# Altium PCB PCB_MKD_V2.PcbDoc
Units mil, origin at the board's own origin, x right, y up, seen from the top; angles counter-clockwise.
Board outline 6290 x 3545 mil, 2 copper layers (Top Layer, Bottom Layer); 42 components, 27 nets, 125 pads, 9 vias.
Unrouted connection lines stored in the file: 2.
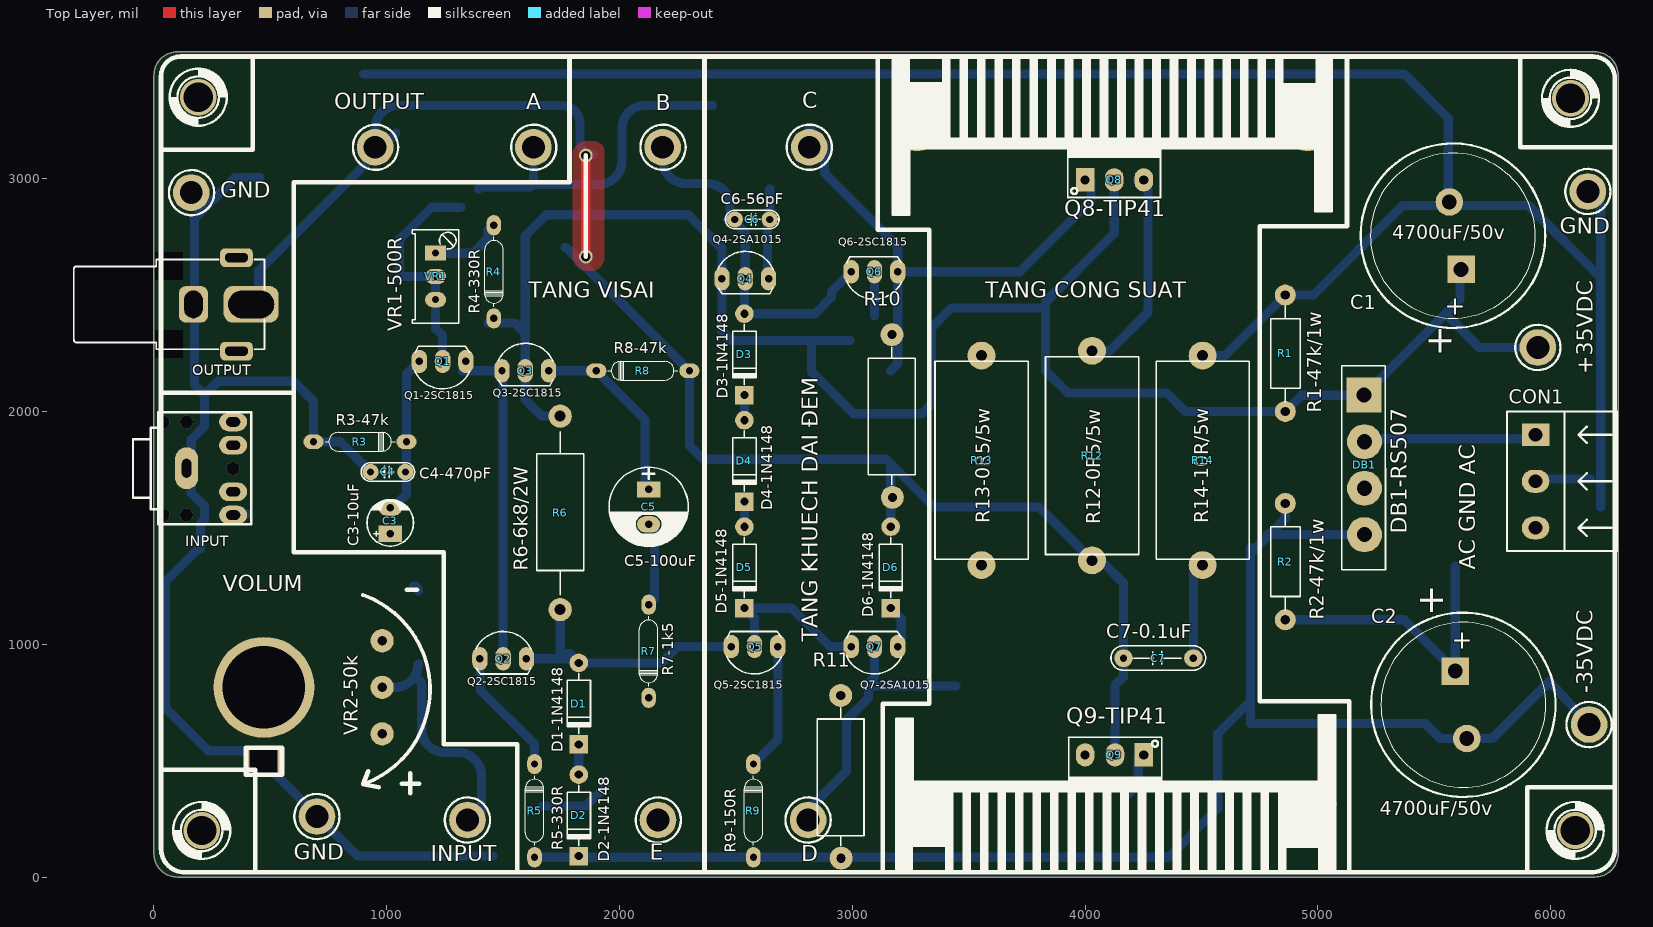
[diagram p0: Top Layer view]
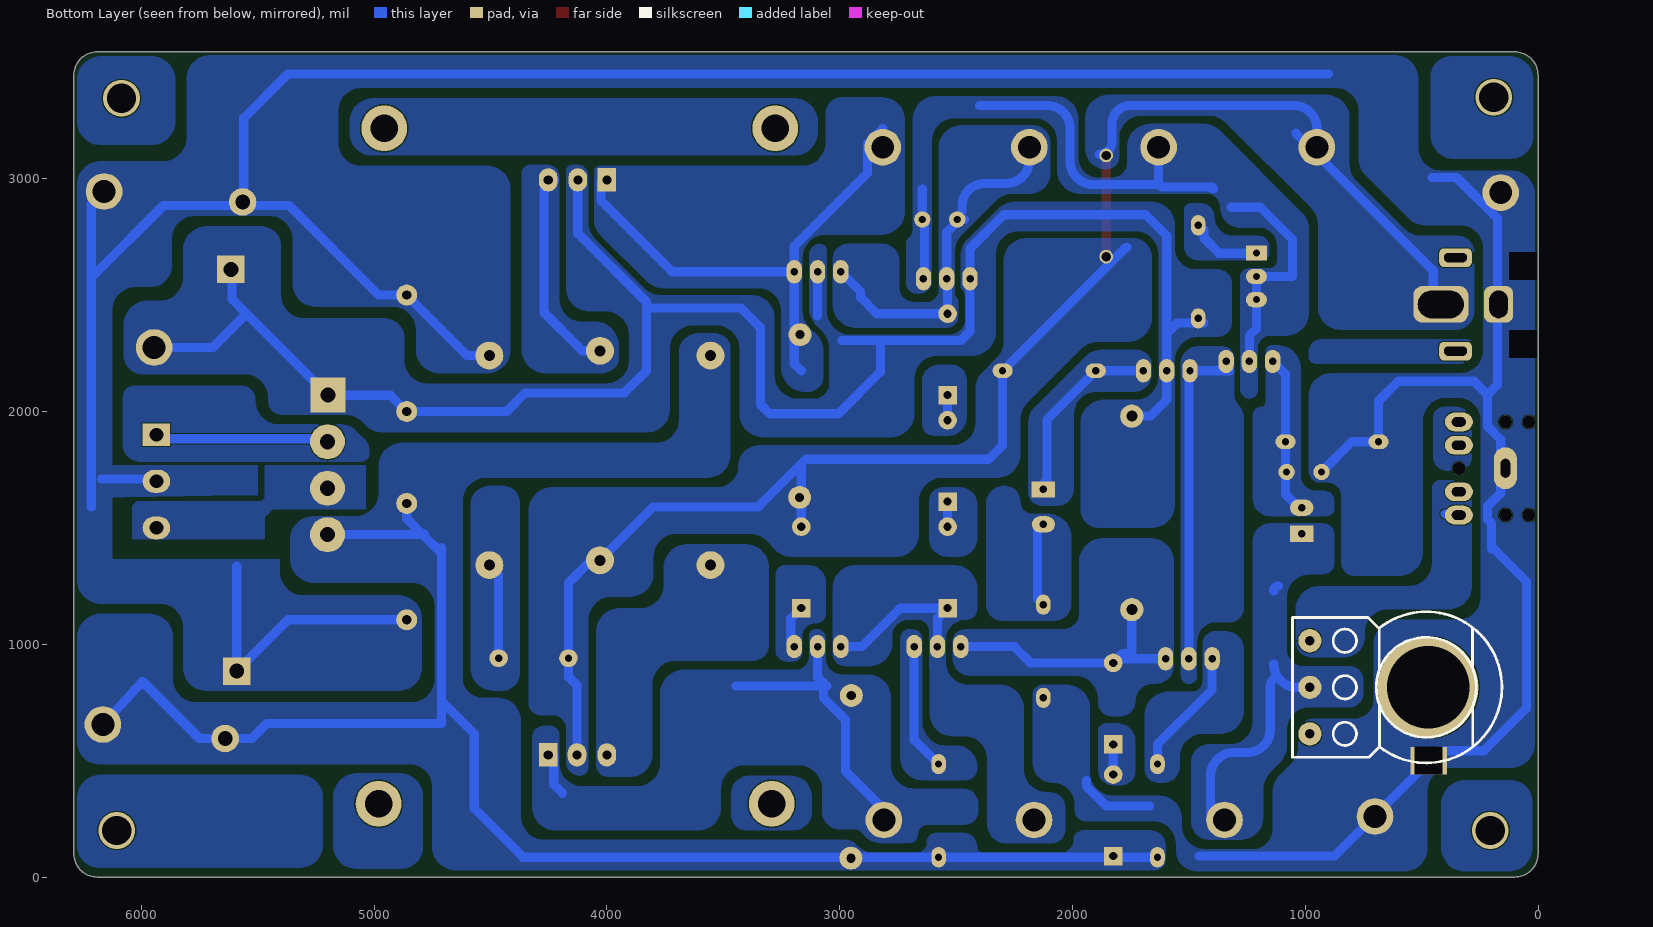
[diagram p1: Bottom Layer view, seen from below]
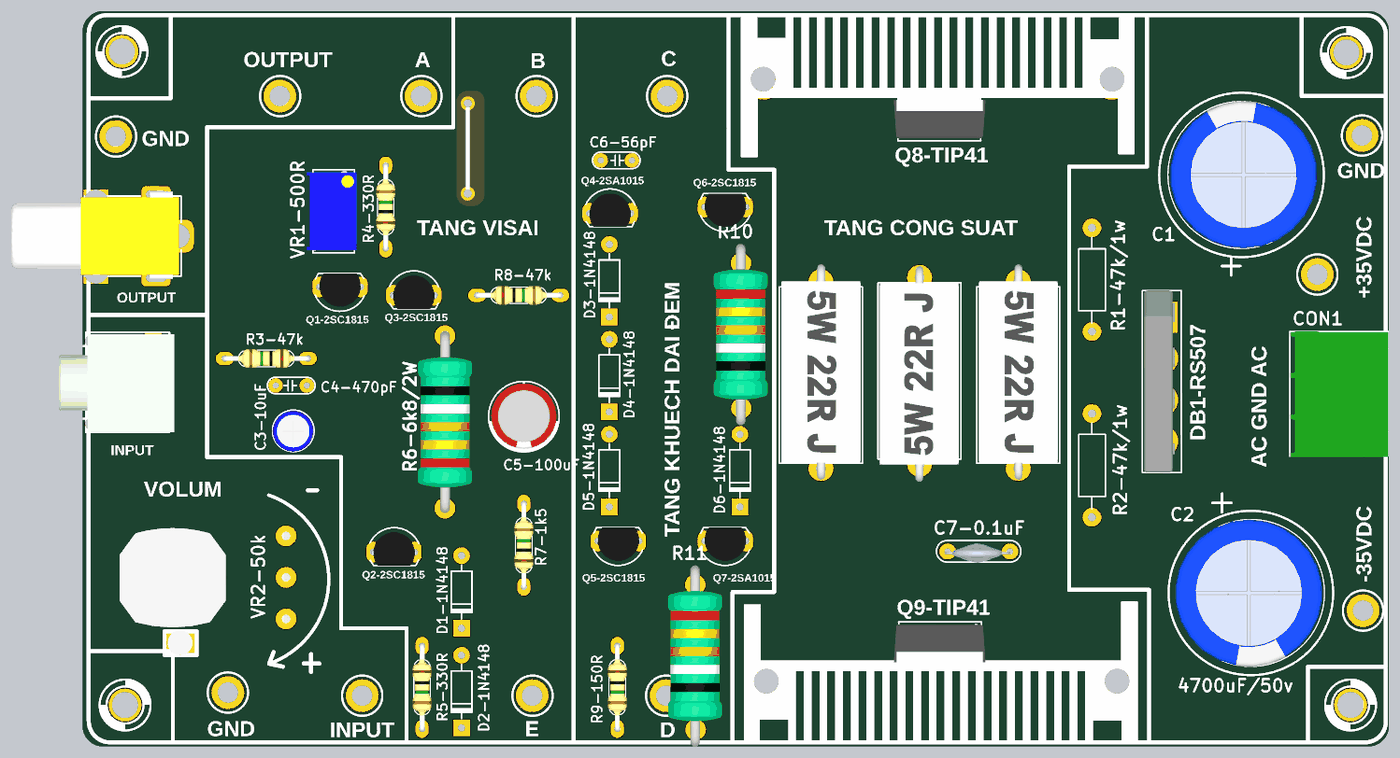
[diagram p2: 3D render of the assembled board from above, using the file's embedded part models]

## Layer stack, top to bottom
Top Solder: solder mask 0.4, Solder Resist, Dk 3.5
Top Layer: signal copper 1.4
Dielectric 1: dielectric 12.6, FR-4, Dk 4.8
Bottom Layer: signal copper 1.4
Bottom Solder: solder mask 0.4, Solder Resist, Dk 3.5

## Board outline
100,3545 ccw(c100,3445) 0,3445 0,100 ccw(c100,100) 100,0 6190,0 ccw(c6190,100) 6290,100 6290,3445 ccw(c6190,3445) 6190,3545

## Design rules (kind name [scope] priority, off if disabled: settings)
Clearance [All] p1: gap=10 ignorepadtopadclearanceinfootprint=FALSE except(0: Arc-Hole Track-Hole SMDPad-Hole THPad-Hole Via-Hole Fill-Hole Poly-Hole Region-Hole Text-Hole; 5: Arc-Fill Arc-Poly Arc-Region Track-Fill Track-Poly Track-Region SMDPad-Fill SMDPad-Poly SMDPad-Region THPad-Fill THPad-Poly THPad-Region Via-Fill Via-Poly Via-Region Fill-Fill Fill-Poly Fill-Region Poly-Poly Poly-Region Region-Region)
PlaneConnect [All] p1: planeconnectstyle=Direct reliefexpansion=20 reliefentries=4 reliefconductorwidth=10 reliefairgap=10
PolygonConnect [All] p1: connectstyle=Direct reliefconductorwidth=10 reliefentries=4 polygonreliefangle="90 Angle" airgapwidth=10
RoutingVias [All] p1: holewidth=28 width=50 viastyle="Through Hole" minholewidth=28 minwidth=50 maxholewidth=28 maxwidth=50
SolderMaskExpansion [All] p1: expansion=4
Width [All] p1: maxlimit=39.37 minlimit=39.37 preferedwidth=39.37 minimp=50.000000 maximp=50.000000 favimp=50.000000
29 further rules are at their usual default settings.

## Components (designator, comment, footprint, x,y, rotation, side; value= is the part's Value field where it differs from the comment)
C1 "4700uF/50v" CA-ALU-18 5580,2755 r90 top value=104
C2 "4700uF/50v" CA-ALU-18 5625,740 r270 top value=104
C3 "C3-10uF" CP1/2 1015,1475 r90 top value=10uF/50V
C4 "C4-470pF" CN1.5 930,1740 r0 top value=0.01uF
C5 "C5-100uF" CP1.5/3.4 2125,1665 r270 top value=100uF/35V/50V
C6 "C6-56pF" CN1.5 2645,2825 r180 top value=0.01uF
C7 "C7-0.1uF" CN3 4465,940 r180 top value=0,047uF
CON1 "CON3" "CON 3 5.08" 5935,1700 r270 top
D1 "D1-1N4148" D1A 1825,920 r90 top value=1N4007
D2 "D2-1N4148" D1A 1825,440 r90 top value=1N4007
D3 "D3-1N4148" D1A 2536.5,2420 r90 top value=1N4007
D4 "D4-1N4148" D1A 2536.5,1962.5 r90 top value=1N4007
D5 "D5-1N4148" D1A 2536.5,1505 r90 top value=1N4007
D6 "D6-1N4148" D1A 3165,1505 r90 top value=1N4007
DB1 "DB1-RS507" "DIO-Bri 5A" 5200,2070 r270 top value="Cau 1A"
INPUT "CON Phone" "CON Phone2" 240,1755 r90 top
OUTPUT "CON Video" TRC-005 445,2460 r0 top
Q1 "Q1-2SC1815" TO92-123 1240,2215 r180 top value=C1815
Q2 "Q2-2SC1815" TO92-123 1500,937.43 r0 top value=C1815
Q3 "Q3-2SC1815" TO92-123 1595,2175 r0 top value=C1815
Q4 "Q4-2SA1015" TO92-123 2540,2570 r0 top value=A1015
Q5 "Q5-2SC1815" TO92-123 2580,990 r180 top value=C1815
Q6 "Q6-2SC1815" TO92-123 3095,2600 r180 top value=C1815
Q7 "Q7-2SA1015" TO92-123 3095,990 r180 top value=A1015
Q8 "Q8-TIP41" QTO-220#1 4025,2995 r0 top value=TIP41C
Q9 "Q9-TIP41" QTO-220#2 4228.46,525 r180 top value=TIP41C
R1 "R1-47k/1w" R1W 4860,2500 r270 top value="R1W - 100"
R2 "R2-47k/1w" R1W 4860,1605 r270 top value="R1W - 100"
R3 "R3-47k" "DIEN TRO 1/4 W" 1085,1870 r180 top value=47k
R4 "R4-330R" "DIEN TRO 1/4 W" 1460,2400 r90 top value=4k7
R5 "R5-330R" "DIEN TRO 1/4 W" 1635,485 r270 top value=R
R6 "R6-6k8/2W" R2W 1745,1149 r90 top value="R2W - 47"
R7 "R7-1k5" "DIEN TRO 1/4 W" 2125,770 r90 top value=1k5
R8 "R8-47k" "DIEN TRO 1/4 W" 1900,2175 r0 top value=45k
R9 "R9-150R" "DIEN TRO 1/4 W" 2575,485 r270 top value=120R
R10 "330" "RES 2W-" 3170,1980 r270 top
R11 "330" "RES 2W-" 2950,430 r270 top
R12 "R12-0R5/5w" R5W 4030,1360.68 r90 top value="R5W - 0,47R"
R13 "R13-0R5/5w" R5W 3555,2240 r270 top value="R5W - 0,47R"
R14 "R14-10R/5w" R5W 4505,2240 r270 top value="R5W - 0,47R"
VOLUM "VOL-50K" VOL_SMD 980,615 r90 top value="Volume 50k"
VR1 "VR1-500R" VR1 1210,2680 r270 top value="VR 10K"

## Footprints (in the part's own frame and the unit in brackets; to place one, negate y for a bottom-side part, rotate by r counter-clockwise, add the part's x,y. Pads: shape width x height; smd on the part's side, far side on the other; paste and mask are expansions set on the pad)
CA-ALU-18 [mm] "Polarized capacitors, Aluminum Electrolytic Capacitors, 2-Leads, Body 18x35.5x7.5x0.8"
  rect 3x3 hole 1.6: 1(-3.683,-0.889)
  round 3 hole 1.6: 2(3.683,0.381)
  silkscreen extent -9,-9 9,9, body extent -9,-9.25 9.05,8.75, height 35.45
CN1.5 [mil]
  round 70 hole 31: 1(0,0) 2(150,0)
  silkscreen extent -40,-40 190,40
CN3 [mil] "Cap np W 0.3"
  oval 80x75 hole 31: 1(0,0) 2(300,0)
  silkscreen extent -53,-53 354,51, body extent 0,-39 315,55, height 419
"CON 3 5.08" [mm]
  rect 2.5x3 hole 1.5: 1(-5.08,0)
  oval 2.5x3 hole 1.5: 2(0,0) 3(5.08,0)
  silkscreen extent -7.62,-3.1 7.62,8.89, body extent -7.62,-3.05 7.71,8.95, height 8.6
"CON Phone2" [mil]
  oval 80x120 hole 40 slot 60 at 90 deg: 1(-200,-100) 2(-100,-100) 3(100,-100) 4(200,-100)
  oval 180x100 hole 40 slot 80 at 0 deg: 5(1,100)
  silkscreen extent -240,-178 241,330, body extent -239,-202 233,354, height 394
CP1.5/3.4 [mil] "Tu hoa 220->470uF,16V, 470uF/16V,25V"
  rect 70x100 hole 32: 1(0,0)
  oval 70x100 hole 32: 2(150,0)
  silkscreen extent -95,-170 245,170, body extent -85,-157 230,157, height 446
CP1/2 [mil] "Tu hoa < 22uF/16>50V"
  rect 70x100 hole 32: 1(0,0)
  oval 70x100 hole 32: 2(111.61,0)
  silkscreen extent -53,-100 146,100, body extent -54,-99 144,100, height 296
D1A [mil] "Diode 1A, W 100mil, L 350mil"
  round 80 hole 35: 1(0,0)
  rect 80x80 hole 35: 2(-350,0)
  silkscreen extent -305,-50 -45,50, body extent -366,-42 16,41, height 100
"DIEN TRO 1/4 W" [mm]
  oval 2.2x1.6 hole 0.787: 1(0,0) 2(10.16,0)
  silkscreen extent 1.26,-1.02 8.88,1.02, body extent -0.3,-1.16 10.46,1.16, height 2.93
"DIO-Bri 5A" [mil] "Brigde 5A"
  rect 150x150 hole 65: 1(0,-2)
  round 150 hole 65: 2(200,0) 3(400,0) 4(599,0)
  silkscreen extent -127,-97 750,90, body extent -129,-90 749,58, height 937
QTO-220#1 [mil] "TO-220 - 1-2-3"
  rect 80x100 hole 39: 1(-25,0)
  oval 80x100 hole 39: 2(100,0) 3(226.97,0)
  silkscreen extent -100,-76 300,130, body extent -119,-64 322,121, height 905
QTO-220#2 [mil] "TO-220 - 1-2-3"
  rect 80x100 hole 39: 1(-23.51,0)
  oval 80x100 hole 39: 2(100,0) 3(228.46,0)
  silkscreen extent -100,-76 300,130, body extent -119,-64 322,121, height 905
R1W [mil] "R 1W, 2 pin, 500mil"
  round 90 hole 39.37: 1(0,0) 2(500,0)
  silkscreen extent 46,-63 460,65
R2W [mm] "R2W, 2 pin, 700mil"
  round 2.54 hole 1.2: 1(0,0) 2(21.107,0)
  silkscreen extent 1.63,-2.57 19.41,2.54, body extent -0.6,-3.3 21.6,3.3, height 8.3
R5W [mil] "R5W , 2 pin, 400 x 950mil"
  round 120 hole 47.24: 1(0,0) 2(900,0)
  silkscreen extent 25,-200 875,200, body extent -85,-190 955,192, height 363
"RES 2W-" [mm]
  round 2.5 hole 1: 1(-8.89,0) 2(8.865,0.051)
  silkscreen extent -7.52,-2.57 7.49,2.54, body extent -11.25,-3.33 10.95,3.27, height 8.3
TO92-123 [mil] "TO-92"
  oval 66x100 hole 32: 1(-100,0) 2(0,0) 3(100,0)
  silkscreen extent -117,-65 120,118, body extent -109,-66 109,95, height 245
TRC-005 [mm] "RCA Phono Jack, Right Angle, Thru-Hole, Body 20.8 x 9.8 x 11 mm (LxWxH)"
  rrect50% 3.2x4 hole 2 slot 3 at 90 deg mask+0: 1(-7,0)
  rrect50% 3.556x2.032 hole 1 slot 2.5 at 0 deg: 2(-2.3,5.1) 3(-2.3,-5.1)
  rrect50% 6x4 hole 5 slot 3 at 90 deg: 4(-0.7,0)
  silkscreen extent -20.05,-4.9 0.75,4.9, body extent -20.02,-5.27 0.48,5.52, height 13.58
VOL_SMD [mil]
  round 433.07 hole 354.33: 0(200,507.56)
  round 100 hole 40: 1(0,0) 2(200,0) 3(400,0)
  body extent -203,-247 600,948, height 866
VR1 [mil] "Variable Resistor"
  rect 65x90 hole 30: 1(0,0)
  oval 65x90 hole 30: 2(100,0) 3(200,0)
  silkscreen extent -100,-100 301,100, body extent -88,-130 288,110, height 455

## Part data
C1 C2: library part CN-ALU-DIP, "Capacitor (Semiconductor SIM Model)", LatestRevisionDate=17-Jul-2002, LatestRevisionNote="Re-released for DXP Platform.", PackageReference=C1206, Publisher="Altium Limited"
C3: library part CP1, "Cap P  0,1uF < 22uF , 16 - 50V", Description 1="10 => 220uF/6,3V/10V - 10uF => 100uF/16V", Description 2="0,1uF => 33uF/50V - 10uF => 22uF/63V", Description 3="0,47uF => 10uF/100V"
C4 C6: library part CN1.5, "Cap np 682pF => 104pF"
C5: library part CP3, "Cap 100uF/35V - 470uF/16V", Description 1="1000uF/6,3V - 470uF/16V - 330uF - 25V", Description 2="220uF/35V - 100uF/50V - 63V - 4,7uF/200V", Description 3="22uF => 33uF100V - 3,3uF => 4,7uF/250V", Description 4="2,2uF =>3,3uF/350 - 2,2uF/400V - 1uF/450V"
C7: library part CN3, "Cap np W0.3", Copyright=VanDungEvn
D1 D2 D3 D4 D5 D6: library part D1A, "Diode 1A"
DB1: library part "DIODE BRIGDE", "Convert AC to DC voltage, 4 pin", ="Cau 5A"
INPUT: library part "CON Phone2", "Jac Phone Stereo", Creat by=VanDungEvn@Gmail.com
OUTPUT: library part "CON Video1", "Jac Video Stereo"
Q1 Q2 Q3 Q5 Q6: library part 2SC1815, "NPN 600mW, ECB", =C2383
Q4 Q7: library part 2SA1015, "PNP 600mW, ECB", =A1013
Q8 Q9: library part TIP41C, "NPN 2W, BCE", =H1061
R1 R2: library part R1W, "Resistor 1W"
R3 R4 R5 R7 R8 R9: library part "Res 1/4 W", "Resistor", LatestRevisionDate=17-Jul-2002, LatestRevisionNote="Re-released for DXP Platform.", PackageReference=AXIAL-0.4, Published=8-Jun-2000, Publisher="Altium Limited"
R6: library part R2W, "Resistor 2W"
R10 R11: library part "Res 2W"
R12 R13 R14: library part R5W, "Resistor 5W"
VOLUM: library part VOL-S, "Var Resistor"
VR1: library part VR, "Var Resistor"

## Free pads (board coordinates)
  round 196.85 hole 118.11: 2(3277.13,3216.54) 2(4980.75,314.96) 3(3292.13,314.96) 3(4956.81,3216.54)
  round 59.06 hole 39.37: 20(1855,2665) 21(1855,3100)
  round 157.48 hole 98.43: 22(6160,2945) 23(5945,2275) 24(6165,655) 25(700,260) 26(1346.67,245) 28(2810,245) 29(2815,3135) 31(950,3135) 32(160,2940) 34(1630,3135) 35(2165,245) 36(2185,3135)
  rect 118.11x118.11 hole 118.11 square: 38(65,2625) 39(65,2290)
  rect 157.48x118.11 hole 118.11 square: 43(470,500)

## Via types
v1: diameter 55, hole 55, Top Layer to Bottom Layer, 5 vias
v2: diameter 157.48, hole 125.98, Top Layer to Bottom Layer, 4 vias

## Nets (pads, with @x,y where several pads share a name; then routed paths per layer and width w, separated by ;. In a path a pad name is that pad's centre, name@x,y a point inside that pad or via, vN(x,y) a via of type N, cw(c..) or ccw(c..) an arc to the next point about the centre after c; other vN are vias at no path point)
GND: C1.2 C2.1 C4.1 CON1.2 INPUT.5 OUTPUT.1 pad.22 pad.25 pad.32 pad.38 pad.39 pad.43 R1.1 R2.2 R3.2 R7.1 R14.1 VOLUM.3 | length 15704.3
  Bottom Layer w39.37: 455,3005 350,3005 174.41,2829.41 174.41,2114.96 217.19,2072.19 ; 900,3450 5370,3450 5560,3260 C1.2@5560,2885 ; C4.1 800,1870 R3.2 685,2045 600,2130 275,2130 217.19,2072.19 ; 1455,90 875,90 467.5,497.5 422.5,542.5 232.5,542.5 50,725 50,1270 190,1410 200,1410 200,1519.13 217.19,1536.31 217.19,1592.81 160,1650 160,1879.13 217.19,1936.31 217.19,2072.19 ; 1670,305 1855,305 1940,390 1940,415 ; R14.1 4600,2240 R1.1 4980,2500 5365,2885 C1.2@5560,2885 ; R2.2 5370,1105 C2.1 5590,1335 ; CON1.2 5945,1710 6170,1710 ; pad.22 6215,2890 6215,2575 ; 6215,1590 6215,2575 ; C1.2@5560,2885 5905,2885 6215,2575
NetC1_1: C1.1 DB1.1 pad.23 Q3.2 Q4.1 Q6.2 Q8.2 R1.2 R4.1 R6.2 | length 8277.3
  Bottom Layer w39.37: R4.1@1435,2380 1550,2380 1595,2335 ; R6.2 1665,1980 1595,2050 Q3.2 1595,2335 ; 2990,2305 2825,2305 ; 3095,2410 Q6.2 ; Q8.2 4125,2765 3830,2470 3830,2445 ; C1.1@5610,2595 5610,2482 5548,2420 ; pad.23 5693,2275 5548,2420 ; 1595,2335 1595,2755 1685,2845 2295,2845 2440,2700 Q4.1 2440,2345 2480,2305 2825,2305 ; 2825,2305 2825,2170 3005,1990 3300,1990 3340,2030 3340,2360 3425,2445 3830,2445 ; 3830,2445 3830,2175 3925,2080 4350,2080 4430,2000 R1.2 4930,2070 DB1.1 5548,2420
NetC2_2: C2.2 D2.2 DB1.4 pad.24 R2.1 R5.2 R9.2 R11.2 R13.1 | length 6659.8
  Bottom Layer w39.37: R5.2 R9.2 4360,85 4570,295 4570,615 4710,755 ; 4710,1415 4710,1390 ; R2.1 4860,1540 4795,1475 4788,1475 4784,1471 4791,1471 ; DB1.4 4791,1471 ; pad.24 5995,840 5750,595 C2.2 5525,595 5460,660 4710,660 4710,755 ; 4710,755 4710,1390 ; 4710,1390 4791,1471
NetC3_1: C3.1 pad.26 VOLUM.2 | length 1044.8
  Bottom Layer w39.37: VOLUM.2 1035,815 ccw(c1035,915) 1115.64,855.86 ; 1115,1250 cw(c1115,1230) 1135,1230 ; 1135,915 cw(c1035,915) 1115.64,855.86 ; pad.26@1406.67,245 1406.67,435 ccw(c1306.67,435) 1306.67,535 1250,535 cw(c1250,635) 1150,635 1150,821.5 ccw(c1115.64,821.5) 1115.64,855.86
NetC3_2: C3.2 C4.2 Q1.3 R3.1 | length 691.8
  Bottom Layer w39.37: C3.2@1015,1575 1085,1645 R3.1 1085,2160 Q1.3
NetC5_1: C5.1 Q3.3 R8.1 | length 818.6
  Bottom Layer w39.37: Q3.3 R8.1 2110,1965 2110,1705 C5.1@2150,1665
NetC5_2: C5.2 R7.2 | length 355.4
  Bottom Layer w39.37: R7.2 2150,1195 C5.2@2150,1515
NetC6_1: C6.1 pad.34 Q1.2 Q4.3 VR1.2 VR1.3 | length 2828.1
  Bottom Layer w39.37: Q1.2 1240,2325 1210,2355 VR1.3 VR1.2 1055,2580 1055,2740 1192.5,2877.5 1317.5,2877.5 ; 1395,2955 cw(c1405,2955) 1405,2965 1610,2965 ccw(c1610,2985) 1630,2985 ; pad.34@1630,3130 1630,2985 ; 2400,3315 2110,3315 ccw(c2110,3215) 2010,3215 2010,3075 cw(c1910,3075) 1910,2975 1635,2975 cw(c1635,2980) 1630,2980 1630,2985 ; C6.1@2635,2825 2635,2575 Q4.3 ; C6.1 2645,2955
NetC6_2: C6.2 D3.1 pad.36 Q4.2 Q6.3 | length 1476.1
  Bottom Layer w39.37: pad.36 2185,3080 ccw(c2285,3080) 2285,2980 2375,2980 cw(c2375,2880) 2475,2880 2475,2860 ; C6.2@2465,2825 2485,2825 2540,2770 Q4.2 2536.5,2566.5 D3.1 2840,2420 2910,2490 2910,2515 Q6.3
NetC7_1: C7.1 R14.2 | length 416.6
  Bottom Layer w39.37: C7.1 4465,1300 R14.2
NetC7_2: C7.2 D6.1 OUTPUT.4 pad.20 pad.21 pad.31 Q9.2 R8.2 R10.2 R12.1 | length 6719
  Top Layer w39.37: pad.20 pad.21
  Bottom Layer w39.37: OUTPUT.4@450,2525 450,2605 1040,3195 ; pad.31@950,3160 950,3215 cw(c1050,3215) 1050,3315 1750,3315 cw(c1750,3235) 1830,3235 1830,3160 ccw(c1885,3160) 1885,3105 ; 1765,2705 1770,2705 R8.2 2300,1855 2360,1795 3145,1795 3165,1775 ; D6.1 3165,1775 ; R12.1 3800.69,1590 3350,1590 3165,1775 ; R12.1@4067.5,1360.68 4165,1263.18 C7.2 4165,860 4128.46,823.46 Q9.2
NetCON1_3: CON1.3 DB1.3
NetD1_1: D1.1 Q2.3 Q5.3 R6.1 | length 1177.1
  Bottom Layer w39.37: Q2.3 D1.1@1807.57,937.43 ; R6.1 1745,960 1785,960 D1.1@1807.57,937.43 ; Q5.3 2250,990 2180,920 D1.1 D1.1@1807.57,937.43
NetD1_2: D1.2 D2.1 | length 130
  Bottom Layer w39.37: D2.1 D1.2
NetD3_2: D3.2 D4.1 | length 107.5
  Bottom Layer w39.37: D4.1 D3.2
NetD4_2: D4.2 D5.1 | length 107.5
  Bottom Layer w39.37: D5.1 D4.2
NetD5_2: D5.2 pad.35 Q5.2 Q7.3 | length 709.9
  Bottom Layer w39.37: Q5.2 2580,1111.5 D5.2 2740,1155 2905,990 Q7.3
NetD6_2: D6.2 Q7.1 | length 189.9
  Bottom Layer w39.37: D6.2 3210,1110 3210,1005 Q7.1
NetINPUT_1: INPUT.1 VOLUM.1 | length 40
  Bottom Layer w39.37: INPUT.1@360,1560 400,1560
NetQ1_1: Q1.1 Q2.2 Q3.1 | length 1455.9
  Bottom Layer w39.37: Q1.1 1340,2190 1325,2175 Q3.1 1500,2170 Q2.2
NetQ2_1: Q2.1 R5.1 | length 549.8
  Bottom Layer w39.37: Q2.1 1400,805 1635,570 R5.1
NetQ5_1: Q5.1 R9.1 | length 548.5
  Bottom Layer w39.37: R9.1 2680,590 Q5.1
NetQ6_1: pad.29 Q6.1 Q8.1 R10.1 | length 2256.2
  Bottom Layer w39.37: 2815,3215 2880,3150 2880,3025 3195,2710 Q6.1 ; 3165,2175 3195,2205 Q6.1 ; Q8.1@4025,2995 4025,2905 3720,2600 Q6.1
NetQ7_2: pad.28 Q7.2 Q9.1 R11.1 | length 1431.4
  Bottom Layer w39.37: pad.28@2795,275 2975,455 2975,675 3070,770 3070,820 ; Q7.2 3095,860 3070,835 ; 3445,820 3070,820 ; 4190,360 4228.46,398.46 Q9.1@4228.46,525 ; 3070,820 3070,835 ; 3070,820 3055,820 3070,835
NetQ8_3: Q8.3 R12.2 | length 859.2
  Bottom Layer w39.37: R12.2@4067.5,2260.69 4105.69,2260.69 4270,2425 4270,2950 Q8.3@4225,2995
NetQ9_3: Q9.3 R13.2
NetR4_2: R4.2 VR1.1 | length 286.9
  Bottom Layer w39.37: VR1.1 1370,2680 1435,2745 R4.2@1435,2780
pads on no net: CON1.1 DB1.2 INPUT.2 INPUT.3 INPUT.4 OUTPUT.2 OUTPUT.3 VOLUM.0
copper on no net: | length 737.6
  Bottom Layer w39.37: 5200,1870 5212.62,1882.62 5932.38,1882.62
  other v1: 40,1555 140,1555 340,1755 40,1955 140,1955
  other v2: 205,200 6105,200 6085,3345 190,3350

## Polygon pours and split planes (outlines as drawn)
no net on Top Overlay (solid): 3405,330
no net on Top Overlay (solid): 4845,3210
GND on Bottom Layer "Bottom Layer-No Net" (solid, remove dead copper, pour order 212): 5500,1770 5500,1640 5575,1640 6195,1630 6195,1770
NetCON1_3 on Bottom Layer "Bottom Layer-No Net" (solid, remove dead copper, pour order 210): 5035,1770 5035,1580 5435,1580 5470,1545 5470,1455 5475,1450 6040,1450 6040,1595 6020,1615 5485,1615 5470,1630 5470,1770
GND on Bottom Layer "Bottom Layer-GND 3" (solid, pour order 162): 2130,825 2025,825 ccw(c2025,725) 1925,725 1925,450 cw(c1825,450) 1825,350 1630,350 ccw(c1630,250) 1530,250 1530,220 cw(c1430,220) 1430,120 1225,120 cw(c1225,205) 1140,205 1140,365 ccw(c1040,365) 1040,465 805,465 cw(c805,565) 705,565 705,1005 ccw(c605,1005) 605,1105 345,1105 cw(c345,1205) 245,1205 245,1960 cw(c345,1960) 345,2060 395,2060 cw(c395,1960) 495,1960 495,1395 ccw(c595,1395) 595,1295 790,1295 790,1695 935,1695 ccw(c935,1745) 985,1745 985,2065 ccw(c885,2065) 885,2165 335,2165 cw(c335,2265) 235,2265 235,2700 cw(c335,2700) 335,2800 483.58,2800 ccw(c483.58,2900) 554.29,2829.29 740.71,3015.71 ccw(c670.01,3086.42) 770,3086.42 770,3300 770,3290 cw(c870,3290) 870,3390 5055,3390 cw(c5055,3290) 5155,3290 5155,3080 cw(c5055.01,3079.99) 5055,2980 4515,2980 ccw(c4515,2880) 4415,2880 4415,2265 ccw(c4515,2265) 4515,2165 4720,2165 ccw(c4720,2265) 4820,2265 4820,2350 cw(c4920,2350) 4920,2450 5250,2450 ccw(c5250,2550) 5350,2550 5350,2740 cw(c5450,2740) 5450,2840 5770,2840 cw(c5770,2740) 5870,2740 5870,2625 ccw(c5960,2625) 5960,2535 6025,2535 cw(c6025,2435) 6125,2435 6125,1365 5405,1365 5405,1310 cw(c5305.01,1309.99) 5305,1210 4895,1210 ccw(c4895,1110) 4795,1110 4795,900 ccw(c4895,900) 4895,800 5720,800 ccw(c5720,900) 5820,900 5820,1075 cw(c5920,1075) 5920,1175 6175,1175 ccw(c6175,1275) 6275,1275 6275,2975 ccw(c6175,2975) 6175,3075 5905,3075 cw(c5905,3175) 5805,3175 5805,3430 ccw(c5705,3430) 5705,3530 615,3530 ccw(c615,3430) 515,3430 515,3135 cw(c415.01,3134.99) 415,3035 115,3035 ccw(c115,2935) 15,2935 15,570 ccw(c115,570) 115,470 375,470 cw(c375,370) 475,370 475,125 ccw(c575,125) 575,25 1465,25 ccw(c1465,115) 1555,115 1555,140 cw(c1655,140) 1655,240 1945,240 ccw(c1945,285) 1990,285 1990,310 cw(c2085,310) 2085,405 ccw(c2085,490) 2170,490 2170,785 ccw(c2130,785)
no net on Bottom Layer "Bottom Layer-NetDB1_2" (solid, pour order 74): 5570,2110 ccw(c5570,2050) 5510,2050 5510,2045 cw(c5410,2045) 5410,1945 5146.42,1945 ccw(c5146.42,1845) 5075.71,1915.71 5044.75,1884.75 ccw(c5104.5,1825) 5020,1825 5020,1820 ccw(c5055,1820) 5055,1785 6005,1785 ccw(c6005,1860) 6080,1860 6080,2060 ccw(c6030,2060) 6030,2110
GND on Bottom Layer "Bottom Layer-GND" (solid, pour order 206): 705,820 705,765 ccw(c790,765) 790,680 970,680 cw(c970,620) 1030,620 1030,557.84 ccw(c1130,557.84) 1059.29,487.13 1103.75,442.68 cw(c1088.65,427.58) 1110,427.58 1110,355 856.21,355 ccw(c856.21,303.79) 820,340 632.07,527.93 cw(c649.14,545) 625,545
GND on Bottom Layer "Bottom Layer-GND 1" (solid, pour order 200): 939.92,1695 905,1695 ccw(c905,1635) 845,1635 845,1350 cw(c790,1350) 790,1295 775,1295 cw(c775,1370) 700,1370 700,1760 cw(c720,1760) 720,1780
no net on Bottom Layer "Bottom Layer-No Net" (solid, pour order 196): 925,1690
no net on Bottom Layer "Bottom Layer-NetJ1_1" (solid, pour order 194): 340,1705 ccw(c340,1650) 285,1650 285,1250 ccw(c385,1250) 385,1150 645,1150 cw(c645,1050) 745,1050 745,1030 ccw(c830,1030) 830,945 975,945 ccw(c975,1010) 1040,1010 1040,1150 ccw(c940,1150) 940,1250 555,1250 cw(c555,1350) 455,1350 455,1670 ccw(c420,1670) 420,1705
no net on Bottom Layer "Bottom Layer-No Net 1" (solid, pour order 186): 305,2310 ccw(c305,2280) 275,2280 275,2265 ccw(c335,2265) 335,2205 955,2205 ccw(c955,2235) 985,2235 985,2255 ccw(c930,2255) 930,2310
NetC7_2 on Bottom Layer "Bottom Layer-NetC7_2" (solid, pour order 184): 1800,3095 ccw(c1855,3095) 1855,3040 ccw(c1855,3130) 1945,3130 1945,3260 ccw(c1845,3260) 1845,3360 910,3360 ccw(c910,3260) 810,3260 810,3061.42 cw(c710,3061.42) 780.71,2990.71 574.29,2784.29 cw(c503.58,2855) 503.58,2755 345,2755 ccw(c345,2685) 275,2685 275,2430 ccw(c355,2430) 355,2350 845,2350 ccw(c845,2450) 945,2450 945,2803.58 cw(c1045,2803.58) 974.29,2874.29 1340.71,3240.71 cw(c1411.42,3170) 1411.42,3270 1705,3270 cw(c1705,3175) 1800,3175
no net on Bottom Layer "Bottom Layer-No Net 3" (solid, pour order 182): 1655,3360
NetC6_2 on Bottom Layer "Bottom Layer-NetC6_2" (solid, pour order 178): 2170,3230 ccw(c2170,3155) 2095,3155 2095,3025 ccw(c2185,3025) 2185,2935 2258.58,2935 cw(c2258.58,2835) 2329.29,2905.71 2410,2825 ccw(c2446.21,2861.21) 2446.21,2810 2575,2810 2575,3130 ccw(c2475,3130) 2475,3230
NetC6_1 on Bottom Layer "Bottom Layer-NetC6_1" (solid, pour order 180): 1205,2205 1205,2270 ccw(c1150,2270) 1150,2325 1085,2325 cw(c1085,2425) 985,2425 985,2783.58 cw(c1085,2783.58) 1014.29,2854.29 1365.71,3205.71 cw(c1436.42,3135) 1436.42,3235 1665,3235 cw(c1665,3135) 1765,3135 1765,3070 ccw(c1830,3070) 1830,3005 1890,3005 ccw(c1890,3090) 1975,3090 1975,3255 cw(c2075,3255) 2075,3355 2585,3355 cw(c2585,3255) 2685,3255 2685,2831.42 2685,2786.21 ccw(c2736.21,2786.21) 2700,2750 cw(c2663.79,2713.79) 2715,2713.79 2715,2555 cw(c2665,2555) 2665,2505 2660,2505 cw(c2660,2560) 2605,2560 2605,3160 ccw(c2505,3160) 2505,3260 2165,3260 ccw(c2165,3160) 2065,3160 2065,3035 cw(c1965,3035) 1965,2935 1425,2935 ccw(c1425,2875) 1365,2875 cw(c1280,2875) 1280,2790 1200,2790 ccw(c1200,2710) 1120,2710 1120,2650 ccw(c1155,2650) 1155,2615 1240,2615 cw(c1240,2575) 1280,2575 1280,2098.45 cw(c1236.55,2098.45) 1236.55,2055
NetQ6_1 on Bottom Layer "Bottom Layer-NetQ6_1" (solid, pour order 176): 2820,3350 ccw(c2820,3250) 2720,3250 2720,2860 ccw(c2820,2860) 2820,2760 3060,2760 cw(c3060,2660) 3160,2660 3160,2431.42 cw(c3060,2431.42) 3130.71,2360.71 3099.29,2329.29 ccw(c3170,2258.58) 3070,2258.58 3070,2150 ccw(c3135,2150) 3135,2085 3150,2085 ccw(c3150,2185) 3250,2185 3250,2430 cw(c3350,2430) 3350,2530 3758.58,2530 ccw(c3758.58,2630) 3829.29,2559.29 4025.71,2755.71 ccw(c3955,2826.42) 4055,2826.42 4055,3030 ccw(c4030,3030) 4030,3055 3160,3055 cw(c3160,3155) 3060,3155 3060,3280 ccw(c2990,3280) 2990,3350
NetC3_2 on Bottom Layer "Bottom Layer-NetC3_2" (solid, pour order 172): 1120,2285 ccw(c1120,2185) 1020,2185 1020,1725 cw(c955,1725) 955,1660 920,1660 ccw(c920,1615) 875,1615 875,1585 ccw(c910,1585) 910,1550 1150,1550 ccw(c1150,1625) 1225,1625 1225,1985 ccw(c1190,1985) 1190,2020 cw(c1190,2040) 1170,2040 1170,2260 ccw(c1145,2260) 1145,2285
NetC3_1 on Bottom Layer "Bottom Layer-NetC3_1 2" (solid, pour order 170): 925,1520 ccw(c925,1470) 875,1470 875,1460 ccw(c920,1460) 920,1415 980,1415 cw(c980,1315) 1080,1315 1080,980 cw(c1005,980) 1005,905 940,905 ccw(c940,855) 890,855 890,810 ccw(c970,810) 970,730 980,730 cw(c980,630) 1080,630 1080,561.42 ccw(c1180,561.42) 1109.29,490.71 1150.71,449.29 cw(c1080,378.58) 1180,378.58 1180,260 ccw(c1280,260) 1280,160 1410,160 ccw(c1410,240) 1490,240 1490,495 ccw(c1415,495) 1415,570 1325,570 cw(c1325,670) 1225,670 1225,1445 ccw(c1150,1445) 1150,1520
NetC2_2 on Bottom Layer "Bottom Layer-NetC2_2" (solid, pour order 164): 1835,200 1955,200 cw(c1955,160) 1995,160 ccw(c2050,160) 2050,105 2090,105 2090,50 ccw(c2075,50) 2075,65 1800,65
NetD5_2 on Bottom Layer "Bottom Layer-NetD5_2" (solid, pour order 158): 2545,960 2545,925 cw(c2445,925) 2445,825 2310,825 ccw(c2310,725) 2210,725 2210,465 cw(c2110,465) 2110,365 2100,365 ccw(c2100,295) 2030,295 2030,205 ccw(c2090,205) 2090,145 2285,145 ccw(c2285,225) 2365,225 2365,505 cw(c2465,505) 2465,605 2513.46,605 ccw(c2513.46,705) 2613.46,705 2613.46,896.54 ccw(c2570,896.54) 2570,940
NetQ5_1 on Bottom Layer "Bottom Layer-NetQ5_1" (solid, pour order 156): 2690,1065 ccw(c2690,1020) 2645,1020 2645,665 cw(c2545,665) 2545,565 2500,565 ccw(c2500,475) 2410,475 2410,465 ccw(c2460,465) 2460,415 2640,415 ccw(c2640,515) 2740,515 2740,1025 ccw(c2700,1025) 2700,1065
NetQ7_2 on Bottom Layer "Bottom Layer-NetQ7_2" (solid, pour order 154): 2684.64,380.23 2470.23,380.23 ccw(c2470.23,315) 2405,315 2405,285 ccw(c2465,285) 2465,225 2620,225 cw(c2620,180) 2665,180 ccw(c2698.55,180) 2698.55,146.45 2726.45,146.45 ccw(c2726.45,225) 2805,225
NetC2_2 on Bottom Layer "Bottom Layer-NetC2_2 1" (solid, pour order 150): 1845,200 1915,200 cw(c1915,170) 1945,170 ccw(c2010,170) 2010,105 2385,105 ccw(c2385,130) 2410,130 cw(c2470,130) 2470,190 2585,190 cw(c2585,150) 2625,150 ccw(c2670,150) 2670,105 2754.29,105 cw(c2754.29,99.29) 2760,99.29 2760,60 1865,60
NetC6_2 on Bottom Layer "Bottom Layer-NetC6_2 1" (solid, pour order 102): 2395,2900 ccw(c2395,2880) 2375,2880 ccw(c2423.28,2880) 2389.14,2845.86 2475.71,2759.29 cw(c2405,2688.58) 2505,2688.58 2505,2509.14 cw(c2470.86,2509.14) 2495,2485 ccw(c2507.07,2472.93) 2490,2472.93 2490,2410 ccw(c2540,2410) 2540,2360 2930,2360 ccw(c2930,2460) 3030,2460 3030,2655 ccw(c2965,2655) 2965,2720 2815,2720 ccw(c2815,2650) 2745,2650 2745,2535 cw(c2680,2535) 2680,2470 2625,2470 cw(c2625,2520) 2575,2520 2575,2840 ccw(c2515,2840) 2515,2900
no net on Bottom Layer "Bottom Layer-No Net 4" (solid, pour order 146): 355,2020 ccw(c355,1950) 285,1950 285,1805 ccw(c345,1805) 345,1745 390,1745 ccw(c390,1805) 450,1805 450,1975 ccw(c405,1975) 405,2020
NetC2_2 on Bottom Layer "Bottom Layer-NetC2_2 2" (solid, pour order 140): 1890,200 1665,200 ccw(c1665,135) 1600,135 1600,75 ccw(c1645,75) 1645,30 1855,30 ccw(c1855,85) 1910,85
no net on Bottom Layer "Bottom Layer-No Net 5" (solid, pour order 138): 115,415 ccw(c115,325) 25,325 25,125 ccw(c125,125) 125,25 315,25 ccw(c315,125) 415,125 415,315 ccw(c315,315) 315,415
no net on Bottom Layer "Bottom Layer-No Net 6" (solid, pour order 136): 120,3525 ccw(c120,3425) 20,3425 20,3185 ccw(c120,3185) 120,3085 360,3085 ccw(c360,3185) 460,3185 460,3440 ccw(c375,3440) 375,3525
no net on Bottom Layer "Bottom Layer-No Net 7" (solid, pour order 134): 5955,3525 ccw(c5955,3425) 5855,3425 5855,3245 ccw(c5955,3245) 5955,3145 6175,3145 ccw(c6175,3245) 6275,3245 6275,3425 ccw(c6175,3425) 6175,3525
no net on Bottom Layer "Bottom Layer-No Net 8" (solid, pour order 132): 6175,440 cw(c6175,340) 6275,340 6275,135 cw(c6180,135) 6180,40 5320,40 cw(c5320,140) 5220,140 5220,340 cw(c5320,340) 5320,440
no net on Bottom Layer "Bottom Layer-No Net 9" (solid, pour order 130): 4890,445 ccw(c4890,345) 4790,345 4790,130 ccw(c4885,130) 4885,35 5075,35 ccw(c5075,135) 5175,135 5175,345 ccw(c5075,345) 5075,445
no net on Bottom Layer "Bottom Layer-No Net 10" (solid, pour order 126): 3210,435 ccw(c3210,345) 3120,345 3120,280 ccw(c3200,280) 3200,200 3400,200 ccw(c3400,265) 3465,265 3465,360 ccw(c3390,360) 3390,435
NetD3_2 on Bottom Layer "Bottom Layer-NetD3_2" (solid, pour order 124): 2520,2200 ccw(c2520,2135) 2455,2135 2455,1975 ccw(c2535,1975) 2535,1895 2595,1895 ccw(c2595,1945) 2645,1945 2645,2130 ccw(c2575,2130) 2575,2200
NetC7_2 on Bottom Layer "Bottom Layer-NetC7_2 1" (solid, pour order 122): 2295,2320 2295,2301.42 ccw(c2395,2301.42) 2324.29,2230.71 2385.71,2169.29 cw(c2315,2098.58) 2415,2098.58 2415,1955 ccw(c2515,1955) 2515,1855 2645,1855 2645,1775 cw(c2635,1775) 2635,1765 2325,1765 cw(c2325,1820) 2270,1820 2270,2150 ccw(c2240,2150) 2240,2180
NetD6_2 on Bottom Layer "Bottom Layer-NetD6_2" (solid, pour order 118): 3135,1340 ccw(c3135,1265) 3060,1265 3060,1130 ccw(c3100,1130) 3100,1090 3105,1090 cw(c3105,1035) 3160,1035 3160,970 ccw(c3205,970) 3205,925 3225,925 ccw(c3225,975) 3275,975 3275,1300 ccw(c3235,1300) 3235,1340
NetD4_2 on Bottom Layer "Bottom Layer-NetD4_2" (solid, pour order 116): 2485,1675 ccw(c2485,1600) 2410,1600 2410,1455 ccw(c2490,1455) 2490,1375 2535,1375 ccw(c2535,1455) 2615,1455 2615,1615 ccw(c2555,1615) 2555,1675
NetC5_2 on Bottom Layer "Bottom Layer-NetC5_2" (solid, pour order 114): 2150,1560 2170,1560 ccw(c2170,1615) 2225,1615 cw(c2290,1615) 2290,1680 2295,1680 cw(c2295,1605) 2370,1605 2370,1450 cw(c2310,1450) 2310,1390
NetC5_1 on Bottom Layer "Bottom Layer-NetC5_1" (solid, pour order 112): 1725,2265 ccw(c1725,2200) 1660,2200 1660,2160 ccw(c1735,2160) 1735,2085 1895,2085 cw(c1895,1985) 1995,1985 1995,1665 ccw(c2065,1665) 2065,1595 2135,1595 2130,1595 ccw(c2130,1655) 2190,1655 2190,1948.58 ccw(c2090,1948.58) 2160.71,2019.29 1944.29,2235.71 ccw(c1873.58,2165) 1873.58,2265
NetC7_2 on Bottom Layer "Bottom Layer-NetC7_2 2" (solid, pour order 110): 1740,2745 ccw(c1740,2665) 1660,2665 1660,2400 ccw(c1760,2400) 1760,2300 1888.58,2300 cw(c1888.58,2200) 1959.29,2270.71 2195.71,2034.29 cw(c2125,1963.58) 2225,1963.58 2225,1815 ccw(c2325,1815) 2325,1715 2560,1715 cw(c2560,1615) 2660,1615 2660,1475 ccw(c2760,1475) 2760,1375 3203.58,1375 ccw(c3203.58,1475) 3274.29,1404.29 3315.71,1445.71 cw(c3386.42,1375) 3386.42,1475 3700,1475 cw(c3700,1375) 3800,1375 3800,1305 ccw(c3900,1305) 3900,1205 3980,1205 cw(c3980,1105) 4080,1105 4080,470 ccw(c4115,470) 4115,435 ccw(c4115,495) 4175,495 4175,635 cw(c4235,635) 4235,695 4285,695 ccw(c4285,745) 4335,745 4335,1575 ccw(c4235,1575) 4235,1675 3525,1675 cw(c3525,1765) 3435,1765 ccw(c3345,1765) 3345,1855 2435.83,1855 2345,1810.51 2345,2208.4 cw(c2395,2295) 2295,2295 2295,2645 ccw(c2195,2645) 2195,2745
NetC1_1 on Bottom Layer "Bottom Layer-NetC1_1" (solid, pour order 108): 3055,2625 3055,2690 cw(c3085,2690) 3085,2720 cw(c3085,2675) 3130,2675 3130,2600 cw(c3115,2600) 3115,2585
NetQ9_3 on Bottom Layer "Bottom Layer-NetQ9_3" (solid, pour order 96): 3405,1430 ccw(c3405,1330) 3305,1330 3305,995 ccw(c3370,995) 3370,930 3705,930 cw(c3705,830) 3805,830 3805,525 ccw(c3900,525) 3900,430 3995,430 ccw(c3995,480) 4045,480 4045,1055 ccw(c3945,1055) 3945,1155 3855,1155 cw(c3855,1255) 3755,1255 3755,1330 ccw(c3655,1330) 3655,1430
NetQ7_2 on Bottom Layer "Bottom Layer-NetQ7_2 1" (solid, pour order 94): 3100,1065 ccw(c3100,1025) 3060,1025 3060,940 cw(c2990,940) 2990,870 2880,870 ccw(c2880,770) 2780,770 2780,480 cw(c2680,480) 2680,380 2680,156.43 ccw(c2726.42,245) 2726.42,145 2818.58,145 ccw(c2818.58,245) 2889.29,174.29 2910,195 cw(c2934.14,170.86) 2934.14,205 3000,205 ccw(c3000,280) 3075,280 3075,380 cw(c3175,380) 3175,480 3410,480 cw(c3410,380) 3510,380 3510,300 ccw(c3610,300) 3610,200 4220,200 ccw(c4220,300) 4320,300 4320,600 ccw(c4270,600) 4270,650 4245,650 ccw(c4245,610) 4205,610 4205,490 cw(c4105,490) 4105,390 3870,390 cw(c3870,490) 3770,490 3770,790 ccw(c3670,790) 3670,890 3190,890 cw(c3190,950) 3130,950 3130,1040 ccw(c3105,1040) 3105,1065
NetC7_1 on Bottom Layer "Bottom Layer-NetC7_1" (solid, pour order 100): 4375,875 ccw(c4450,875) 4450,800 4485,800 ccw(c4485,900) 4585,900 4585,1600 ccw(c4505,1600) 4505,1680 4445,1680 ccw(c4445,1610) 4375,1610
NetD5_2 on Bottom Layer "Bottom Layer-NetD5_2 1" (solid, pour order 92): 2510,1340 ccw(c2510,1240) 2410,1240 2410,1150 ccw(c2455,1150) 2455,1105 2460,1105 cw(c2460,1020) 2545,1020 2545,895 ccw(c2575,895) 2575,865 ccw(c2575,905) 2615,905 2615,1055 cw(c2665,1055) 2665,1105 2705,1105 cw(c2705,1035) 2775,1035 2775,1005 ccw(c2875,1005) 2875,905 2975,905 ccw(c2975,960) 3030,960 3030,1240 ccw(c2930,1240) 2930,1340
no net on Bottom Layer "Bottom Layer-No Net 11" (solid, pour order 86): 2685,1055
NetC5_2 on Bottom Layer "Bottom Layer-NetC5_2 1" (solid, pour order 84): 2105,1560 ccw(c2105,1460) 2005,1460 2005,1175 ccw(c2080,1175) 2080,1100 2300,1100 ccw(c2300,1170) 2370,1170 2370,1460 ccw(c2270,1460) 2270,1560
NetC2_2 on Bottom Layer "Bottom Layer-NetC2_2 3" (solid, pour order 54): 3535,2335 ccw(c3535,2270) 3470,2270 3470,1815 ccw(c3570,1815) 3570,1715 4520,1715 cw(c4520,1615) 4620,1615 4620,855 cw(c4535,855) 4535,770 4470,770 ccw(c4470,670) 4370,670 4370,260 cw(c4270,260) 4270,160 2978.28,160 ccw(c2978.28,91.74) 2930,140 2924.29,134.29 cw(c2853.58,204.99) 2853.58,105 2655,105 1699.65,105 1699.65,30 4650,30 ccw(c4650,130) 4750,130 4750,385 cw(c4850,385) 4850,485 6180,485 ccw(c6180,580) 6275,580 6275,1030 ccw(c6175,1030) 6175,1130 5965,1130 ccw(c5965,1030) 5865,1030 5865,850 cw(c5765.01,849.99) 5765,750 4840,750 cw(c4840,850) 4740,850 4740,1165 cw(c4840,1165) 4840,1265 5260,1265 ccw(c5260,1365) 5360,1365 5360,1450 ccw(c5260,1450) 5260,1550 5080,1550 cw(c5080,1650) 4980,1650 4980,1765 ccw(c4880,1765) 4880,1865 3790,1865 cw(c3790,1965) 3690,1965 3690,2255 ccw(c3610,2255) 3610,2335
NetC1_1 on Bottom Layer "Bottom Layer-NetC1_1 1" (solid, pour order 70): 4125,3060 ccw(c4125,3015) 4080,3015 4080,2811.42 cw(c3980.01,2811.42) 4050.71,2740.71 3839.29,2529.29 cw(c3768.58,2599.99) 3768.58,2500 3380,2500 ccw(c3380,2400) 3280,2400 3280,2155 cw(c3180,2155) 3180,2055 3110,2055 cw(c3110,2120) 3045,2120 3045,2273.58 cw(c3145,2273.58) 3074.29,2344.29 3100.71,2370.71 ccw(c3030,2441.42) 3130,2441.42 3130,2640 ccw(c3105,2640) 3105,2665 3095,2665 ccw(c3095,2625) 3055,2625 3055,2430 cw(c2955,2430) 2955,2330 2530,2330 cw(c2530,2400) 2460,2400 2460,2488.79 cw(c2511.21,2488.79) 2475,2525 ccw(c2462.93,2537.07) 2480,2537.07 2480,2668.58 ccw(c2380.01,2668.58) 2450.71,2739.29 2319.29,2870.71 ccw(c2248.59,2800.01) 2248.58,2900 1660,2900 ccw(c1660,2800) 1560,2800 1560,2700 cw(c1470,2700) 1470,2610 1375,2610 ccw(c1375,2550) 1315,2550 1315,2385 ccw(c1380,2385) 1380,2320 1460,2320 cw(c1460,2220) 1560,2220 1560,1600 ccw(c1660,1600) 1660,1500 1885,1500 ccw(c1885,1580) 1965,1580 1965,1950 ccw(c1865,1950) 1865,2050 1730,2050 cw(c1730,2150) 1630,2150 1630,2675 cw(c1730,2675) 1730,2775 2230,2775 cw(c2230,2675) 2330,2675 2330,2340 ccw(c2430,2340) 2430,2240 2580,2240 cw(c2580,2140) 2680,2140 2680,1990 ccw(c2780,1990) 2780,1890 3330,1890 ccw(c3330,1990) 3430,1990 3430,2270 cw(c3530,2270) 3530,2370 3630,2370 cw(c3630,2270) 3730,2270 3730,2010 ccw(c3830,2010) 3830,1910 4963.58,1910 ccw(c4963.58,2010) 5034.29,1939.29 5050.71,1955.71 cw(c5121.42,1885) 5121.42,1985 5395,1985 ccw(c5395,2045) 5455,2045 5455,2060 cw(c5555,2060) 5555,2160 5995,2160 ccw(c5995,2240) 6075,2240 6075,2375 ccw(c5975,2375) 5975,2475 5920,2475 cw(c5920,2575) 5820,2575 5820,2695 ccw(c5720,2695) 5720,2795 5485,2795 ccw(c5485,2710) 5400,2710 5400,2500 cw(c5300,2500) 5300,2400 4955,2400 ccw(c4955,2315) 4870,2315 4870,2220 cw(c4770,2220) 4770,2120 4005,2120 cw(c4005,2220) 3905,2220 3905,2330 cw(c4005,2330) 4005,2430 4075,2430 ccw(c4075,2530) 4175,2530 4175,3035 ccw(c4150,3035) 4150,3060
NetQ8_3 on Bottom Layer "Bottom Layer-NetQ8_3" (solid, pour order 72): 3950,2270 3950,2235 ccw(c4020,2235) 4020,2165 4265,2165 ccw(c4265,2265) 4365,2265 4365,2270 ccw(c4305,2270) 4305,2330 4275,2330
NetQ8_3 on Bottom Layer "Bottom Layer-NetQ8_3 1" (solid, pour order 68): 4255,3060 ccw(c4255,3010) 4205,3010 4205,2485 cw(c4105,2485) 4105,2385 4050,2385 ccw(c4050,2285) 3950,2285 3950,2225 ccw(c4000,2225) 4000,2175 4265,2175 ccw(c4265,2275) 4365,2275 4365,3025 ccw(c4330,3025) 4330,3060
GND on Bottom Layer "Bottom Layer-GND 4" (solid, pour order 62): 4415,2795 4415,2955 cw(c4515,2955) 4515,3055 5055,3055 ccw(c5055,3155) 5155,3155 5155,3215 5270,3215 ccw(c5270,3165) 5220,3165 5220,2720
no net on Bottom Layer "Bottom Layer-No Net 12" (solid, pour order 60): 3195,3345 ccw(c3195,3245) 3095,3245 3095,3200 ccw(c3195,3200) 3195,3100 5010,3100 ccw(c5010,3195) 5105,3195 5105,3245 ccw(c5005,3245) 5005,3345
no net on Bottom Layer "Bottom Layer-No Net 13" (solid, pour order 58): 3320,3340
no net on Bottom Layer "Bottom Layer-No Net 14" (solid, pour order 56): 4565,3340
NetD1_1 on Bottom Layer "Bottom Layer-NetD1_1" (solid, pour order 52): 1665,1455 ccw(c1665,1355) 1565,1355 1565,910 ccw(c1645,910) 1645,830 1655,830 cw(c1655,755) 1730,755 ccw(c1795,755) 1795,690 1830,690 ccw(c1830,750) 1890,750 1890,765 cw(c1990,765) 1990,865 2440,865 ccw(c2440,940) 2515,940 2515,1010 ccw(c2460,1010) 2460,1065 2040,1065 cw(c2040,1135) 1970,1135 1970,1355 ccw(c1870,1355) 1870,1455
NetQ1_1 on Bottom Layer "Bottom Layer-NetQ1_1" (solid, pour order 48): 1265,1155 ccw(c1325,1155) 1325,1095 1380,1095 cw(c1380,1010) 1465,1010 1465,865 ccw(c1500,865) 1500,830 ccw(c1500,865) 1535,865 1535,2205 ccw(c1460,2205) 1460,2280 1355,2280 ccw(c1355,2230) 1305,2230 1305,2073.28 cw(c1236.72,2073.28) 1285,2025 ccw(c1333.28,1976.72) 1265,1976.72
no net on Bottom Layer "Bottom Layer-No Net 15" (solid, pour order 46): 1265,1115
NetC6_1 on Bottom Layer "Bottom Layer-NetC6_1 1" (solid, pour order 42): 1205,2205 1205,2090 ccw(c1240,2090) 1240,2055 ccw(c1240,2090) 1275,2090 1275,2205 ccw(c1255,2205) 1255,2225
NetQ2_1 on Bottom Layer "Bottom Layer-NetQ2_1" (solid, pour order 34): 1540,515 ccw(c1440,515) 1440,615 1365,615 cw(c1365,715) 1265,715 1265,980 cw(c1340,980) 1340,1055 1390,1055 cw(c1390,1005) 1440,1005 1440,845 ccw(c1490,845) 1490,795 1590,795 cw(c1590,695) 1690,695 1690,465 cw(c1630,465) 1630,405 1610,405 cw(c1610,475) 1540,475
no net on Bottom Layer "Bottom Layer-No Net 16" (solid, pour order 32): 1540,405
NetD1_2 on Bottom Layer "Bottom Layer-NetD1_2" (solid, pour order 30): 1855,660 1805,660 ccw(c1805,585) 1730,585 1730,455 ccw(c1790,455) 1790,395 1825,395 ccw(c1825,460) 1890,460 1890,625 ccw(c1855,625)
NetR4_2 on Bottom Layer "Bottom Layer-NetR4_2" (solid, pour order 24): 1450,2895 ccw(c1450,2835) 1390,2835 cw(c1310,2835) 1310,2755 1200,2755 ccw(c1200,2710) 1155,2710 1155,2680 ccw(c1185,2680) 1185,2650 1460,2650 ccw(c1460,2710) 1520,2710 1520,2865 ccw(c1490,2865) 1490,2895
no net on Bottom Layer "Bottom Layer-No Net 2" (solid, pour order 6): 1485,3315
NetC3_1 on Bottom Layer "Bottom Layer-NetC3_1 1" (solid, pour order 202): 875,1460 875,1350 ccw(c925,1350) 925,1300 980,1300 cw(c980,1200) 1080,1200 1080,1170 ccw(c1100,1170) 1100,1150 1145,1150 ccw(c1145,1175) 1170,1175 1170,1450 ccw(c1135,1450) 1135,1485
NetC3_1 on Bottom Layer "Bottom Layer-NetC3_1" (solid, pour order 204): 945,905 810,905 ccw(c810,845) 750,845 750,790 ccw(c810,790) 810,730 1035,730 ccw(c1035,765) 1070,765
NetC7_2 on Top Layer "Top Layer-NetC7_2" (solid, pour order 207): 1855,3160 ccw(c1855,3105) 1800,3105 1800,2665 ccw(c1860,2665) 1860,2605 1880,2605 ccw(c1880,2660) 1935,2660 1935,3115 ccw(c1890,3115) 1890,3160

## Silkscreen, mask and mechanical layers (free items; w line width, h text height)
Top Overlay:
  drawing of 182 lines, arcs and shapes, not listed
  text "C" at 2785,3280 h118.11
  text "OUTPUT" at 775,3275 h118.11
  text "A" at 1600,3275 h118.11
  text "B" at 2155,3270 h118.11
  text "GND" at 285,2895 h118.11
  text "GND" at 6040,2740 h118.11
  text "TANG VISAI" at 1610,2465 h118.11
  text "TANG CONG SUAT" at 3570,2465 h118.11
  text "+" at 5545,2415 h78.74
  text "+35VDC" at 6205,2160 h118.11 r90
  text "AC GND AC" at 5700,1320 h118.11 r90
  text "TANG KHUECH DAI ĐEM" at 2875,1010 h118.11 r90
  text "+" at 5575,980 h78.74
  text "-35VDC" at 6205,790 h118.11 r90
  text "VR2-50k" at 875,610 h60 r90
  text "GND" at 600,50 h118.11
  text "E" at 2130,50 h118.11
  text "INPUT" at 1190,45 h118.11
  text "D" at 2780,45 h118.11
Mechanical 1:
  the board outline again, w10

## Text inside footprints (layer, text, board x,y; h text height)
C1: Top Overlay "+" at 5575,2235 h118.11 r90
C2: Top Overlay "+" at 5440,1255 h118.11 r270
OUTPUT: Mechanical 7 "Assign keep-out area to slot" at 10.91,2760.91 h11.81; Mechanical 7 "Alert PCB fab to slot details" at 10.91,2741.22 h11.81; Mechanical 7 "Mech 2 - Clearance, move to internal plane if present" at 10.91,2705.79 h11.81; Mechanical 7 "Mech 1 - Slot cut-out" at 10.91,2725.47 h11.81